# EAGLE board SMPS_Schematic (EAGLE 7.2.0)
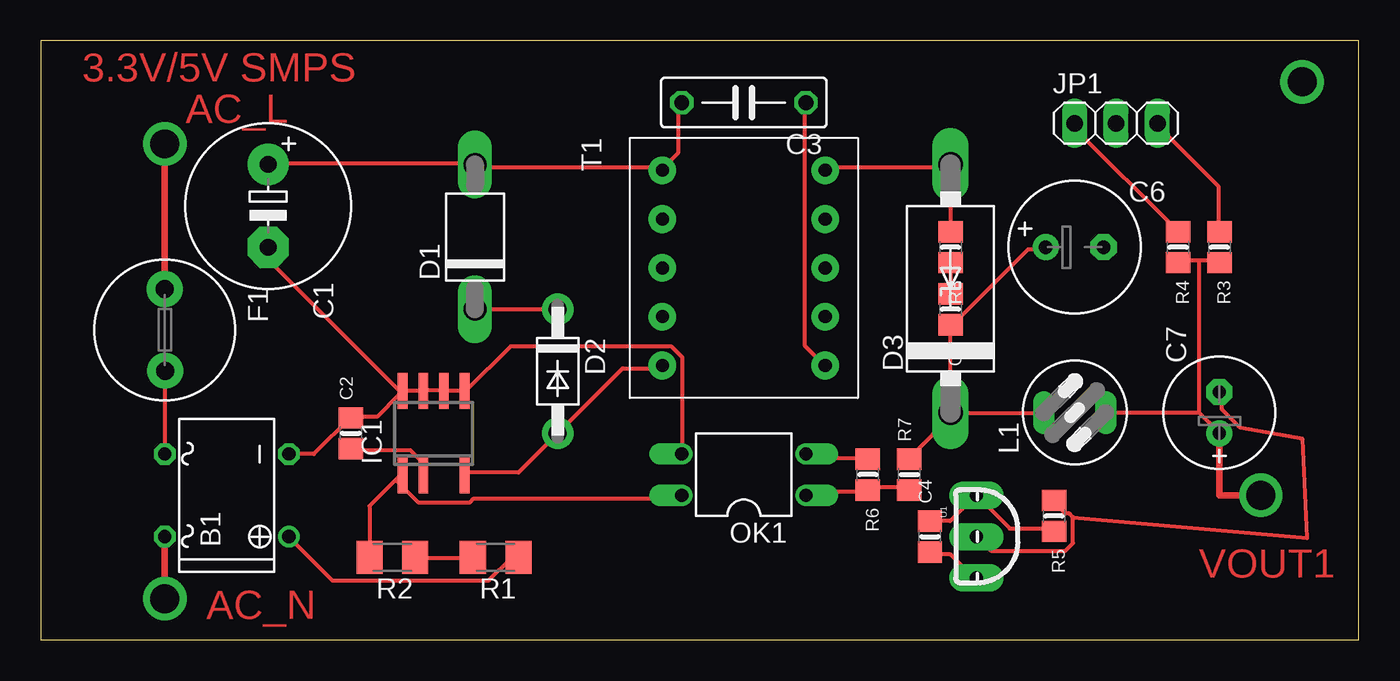
[diagram p0: board, top side]
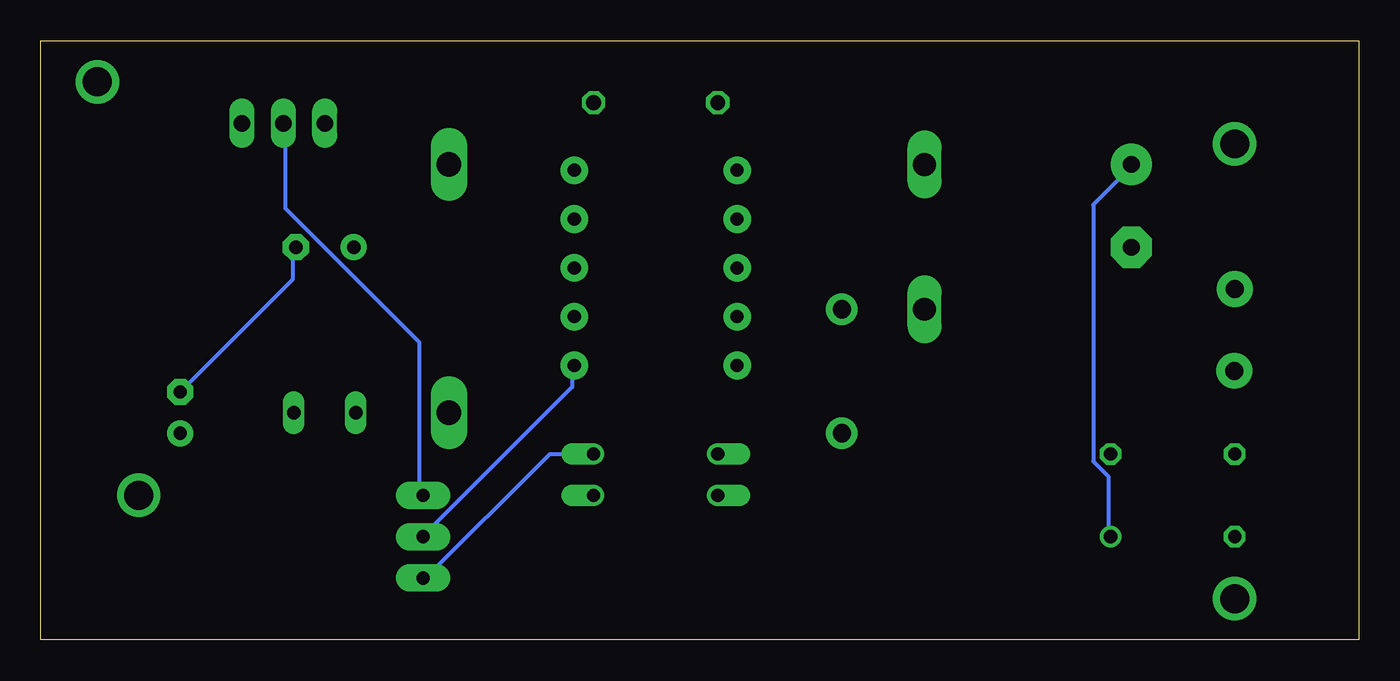
[diagram p1: board, bottom side, seen from below]

Size 80.95 x 36.82 mm. Coordinates in mm from the lower left corner, seen from the top.
Outline: 0,0 80.95,0 80.95,36.82 0,36.82 0,0
Copper layers (1*16): Top 0.035mm / dielectric 1.5mm / Bottom 0.035mm
Design rules "default *": minimum track width 10mil, minimum drill 24mil, track to track 8mil, track to pad 8mil, pad to pad 8mil, via to via 8mil, smd to smd 8mil, copper to edge 40mil, drill to drill 8mil, minimum pad ring 10mil, minimum via ring 8mil, stop-mask expansion 4mil, vias tented up to drill 2mil, thermal gap 10mil

## Footprints (pad centres in the part's own frame; a part is rotated, then mirrored left to right if it is on the bottom)
B-DIL = drill 0.813: + -2.54,-3.81 | drill 0.813 octagon: - 2.54,-3.81; AC1 2.54,3.81; AC2 -2.54,3.81
E5-10,5 = drill 1.016 pad 2.54: + -2.54,0 | drill 1.016 pad 2.54 octagon: - 2.54,0
0805-NO = smd 1.3 x 1.5: 1 -0.95,0; 2 0.95,0
C075-032X103 = drill 0.914 octagon: 1 -3.81,0; 2 3.81,0
E3,5-8 = drill 0.813 pad 1.6: + -1.778,0 | drill 0.813 pad 1.6 octagon: - 1.778,0
E2,5-7 = drill 0.813 pad 1.6: + -1.27,0 | drill 0.813 pad 1.6 octagon: - 1.27,0
CB417-15 = drill 1.397 long: A 2.54,0; C -6.35,0
DO41-10 = drill 1.118 pad 1.93: A 3.81,0; C -3.81,0
C4111-15 = drill 1.499 long: A 7.62,0; C -7.62,0
TR5 = drill 1.1 pad 2.2: P$1 -2.52,-0.01; P$2 2.51,0.02
SO8-C(D_PACKAGE) = smd 0.6 x 2.2: 1 -1.905,-2.6; 2 -0.635,-2.6; 4 1.905,-2.6; 5 1.905,2.6; 6 0.635,2.6; 7 -0.635,2.6; 8 -1.905,2.6
1X03 = drill 1.016 long: 1 -2.54,0; 2 0,0; 3 2.54,0
82114R = drill 0.813 long: 1 0,1.905; 2 0,-1.905
DIL04 = drill 0.813 offset: 1 -1.27,-3.81; 2 1.27,-3.81; 3 1.27,3.81; 4 -1.27,3.81
M1206 = smd 1.6 x 2: 1 -1.4,0; 2 1.4,0
EE16 = drill 0.8 pad 1.7: P$1 -6,-5; P$2 -3,-5; P$3 0,-5; P$4 3,-5; P$5 6,-5; P$6 6,5; P$7 3,5; P$8 0,5; P$9 -3,5; P$10 -6,5
TO-92 = drill 0.813 pad 1.676 long: 1 -2.54,0.318; 2 0,0.318; 3 2.54,0.318

## Placement (x,y rotation side)
B1  [B-DIL]  11.43,8.89 90 top
C1  10uF / 400V  [E5-10,5]  13.97,26.67 270 top
C2  10uF / 16V  [0805-NO]  19.05,12.7 90 top
C3  2.2nF / 250VAC  [C075-032X103]  43.18,33.02 180 top
C4  100nF  [0805-NO]  54.61,6.35 90 top
C5  470pF / 100V  [0805-NO]  55.88,20.32 270 top
C6  330uF / 16V  [E3,5-8]  63.5,24.13 0 top
C7  100uF / 16V  [E2,5-7]  72.39,13.97 90 top
D1  P6KE  [CB417-15]  26.67,26.67 90 top
D2  FR106  [DO41-10]  31.75,16.51 270 top
D3  SR360  [C4111-15]  55.88,21.59 90 top
F1  1A  [TR5]  7.62,19.05 270 top
IC1  TNY284DG  [SO8-C(D_PACKAGE)]  24.13,12.7 0 top
JP1  [1X03]  66.04,31.75 0 top
L1  82114R  [82114R]  63.5,13.97 90 top
OK1  PC817  [DIL04]  43.18,10.16 90 top
R1  2M  [M1206]  27.94,5.08 180 top
R2  2M  [M1206]  21.59,5.08 180 top
R3  23.7k  [0805-NO]  72.39,24.13 270 top
R4  23.7k  [0805-NO]  69.85,24.13 270 top
R5  9.09k  [0805-NO]  62.23,7.62 270 top
R6  1k  [0805-NO]  50.8,10.16 270 top
R7  133R  [0805-NO]  53.34,10.16 90 top
R8  22R  [0805-NO]  55.88,24.13 270 top
T1  TRANSFORMER_EE16  [EE16]  43.18,22.86 270 top
U1  TL431  [TO-92]  57.15,6.35 270 top

## Library data of the parts
B1 = rectifier
C1 C3 C6 C7 R1 R2 = resistor
C2 C4 C5 R3-R8 = microbuilder
D1-D3 U1 = NRG Lib
F1 = nrg_single
IC1 = power_integrations
JP1 = pinhead
L1 = inductors
OK1 = NRG Lib; MPN: PC817X4J000F; OC_FARNELL: 9707727; OC_NEWARK: 97K7059
T1 = nrg_iso_rhythm

## Nets
AN1: C5.2 C6.+ D3.C L1.1 R7.2
BP/M: C2.1 IC1.2
CAT1: C4.1 OK1.2 R6.1 U1.3
DRAIN: D2.A IC1.4 T1.P$5
EN/UV1: IC1.1 OK1.4 R2.2
GND: C7.+ L1.2 R3.2 R4.2
GND1: C3.1 C6.- C7.- R5.1 T1.P$6 U1.2
HV+: B1.+ C1.+ C3.2 D1.A R1.1 T1.P$1
L: F1.P$1
N: B1.AC2
N$1: JP1.1 R4.1
N$2: JP1.3 R3.1
N$5: OK1.1 R6.2 R7.1
N$6: D1.C D2.C
N$7: C5.1 R8.2
N$9: R1.2 R2.1
N$13: C4.2 JP1.2 R5.2 U1.1
N$50: B1.AC1 F1.P$2
SEC1: D3.A R8.1 T1.P$10
SOURCE: B1.- C1.- C2.2 IC1.5 IC1.6 IC1.7 IC1.8 OK1.3

## Tracks (layer width: path | path; a pad name or v marks a point on that pad's centre or on a via)
AC_L  (via drill 1.78)
  Top 0.406: 7.62,21.59 v7.62,30.48
AN1
  Top 0.254: 56.08,13.95 53.34,11.2 R7.2 | 56.08,13.95 61.57,13.95 L1.1 | 56.08,13.95 D3.C 55.85,14.17 55.85,19.2 C5.2 56.08,19.43 60.66,24 61.57,24 C6.+
BP/M
  Top 0.254: C2.1 19.05,11.66 22.71,11.66 23.39,10.97 23.39,10.29 IC1.2
CAT1
  Top 0.254: R6.1 50.6,11.2 47.4,11.2 47.17,11.43 OK1.2 | C4.1 54.71,5.26 55.85,5.26 57.45,3.66 U1.3
  Bottom 0.254: OK1.2 49.68,11.43 57.45,3.66 U1.3
DRAIN
  Top 0.254: IC1.4 26.14,10.29 29.34,10.29 D2.A 35.74,16.69 38.02,16.69 T1.P$5
EN/UV1
  Top 0.254: 21.79,9.83 22.02,10.06 IC1.1 | 21.79,9.83 20.19,8.23 20.19,5.26 R2.2 | 21.79,9.83 23.17,8.46 26.37,8.46 26.59,8.69 39.17,8.69 OK1.4
GND  (via drill 1.78)
  Top 0.254: 71.17,23.32 72.31,23.32 R3.2 | 71.17,23.32 70.03,23.32 R4.2 | 71.17,13.95 71.17,23.32 | 71.17,13.95 72.31,12.8 C7.+ | 71.17,13.95 65.46,13.95 L1.2
  Top 0.406: C7.+ 72.39,8.89 v74.93,8.89
  other vias: 77.47,34.29
GND1
  Top 0.254: 63.4,7.54 63.17,7.77 62.94,7.77 62.25,8.46 R5.1 | 63.4,7.54 63.4,5.94 62.94,5.49 58.37,5.49 57.68,6.17 U1.2 | C3.1 46.94,32.92 46.94,18.06 48.08,16.92 T1.P$6 | 63.4,7.54 77.77,6.27 77.5,12.34 73.69,13.03 72.54,14.17 72.54,15.09 C7.-
  Bottom 0.254: C7.- 65.46,22.17 65.46,24 C6.- | U1.2 57.45,6.4 48.31,15.55 48.31,16.69 T1.P$6
HV+
  Top 0.254: R1.1 29.34,5.03 28.88,5.03 27.51,3.66 17.91,3.66 15.39,6.17 B1.+ | C3.2 39.17,32.92 39.17,29.95 38.25,29.03 T1.P$1 38.02,29.03 26.82,29.03 D1.A 26.59,29.26 14.02,29.26 C1.+
  Bottom 0.254: B1.+ 15.39,6.4 15.39,10.06 16.31,10.97 16.31,26.75 14.02,29.03 C1.+
N  (via drill 1.78)
  Top 0.406: B1.AC2 v7.62,2.54
N$1
  Top 0.254: R4.1 69.8,25.15 63.4,31.55 JP1.1
N$2
  Top 0.254: R3.1 72.31,25.15 72.31,27.89 68.66,31.55 JP1.3
N$5
  Top 0.254: R7.1 53.34,9.37 50.82,9.37 R6.2 50.6,9.14 47.4,9.14 47.17,8.91 OK1.1
N$6
  Top 0.254: D2.C 31.62,20.34 26.82,20.34 D1.C
N$7
  Top 0.254: C5.1 55.85,21.49 55.85,23.09 R8.2
N$9
  Top 0.254: R2.1 23.17,5.03 26.37,5.03 R1.2
N$13
  Top 0.254: C4.2 54.71,7.31 55.85,7.31 57.45,8.91 U1.1 57.68,8.69 59.51,6.86 62.03,6.86 R5.2
  Bottom 0.254: JP1.2 65.91,31.55 65.91,26.52 57.68,18.29 57.68,8.91 U1.1
N$50
  Top 0.254: B1.AC1 7.62,16.46 F1.P$2
SEC1
  Top 0.254: 55.85,29.03 55.85,25.15 R8.1 | 55.85,29.03 48.31,29.03 T1.P$10 | 55.85,29.03 D3.A
SOURCE
  Top 0.254: 24.77,15.32 23.62,15.32 IC1.7 23.39,15.32 22.25,15.32 IC1.8 | 24.77,15.32 25.91,15.32 IC1.5 26.14,15.32 28.88,18.06 38.71,18.06 39.39,17.37 39.39,11.43 OK1.3 | 24.77,15.32 IC1.6 | 19.05,13.72 20.65,13.72 22.02,15.09 IC1.8 | B1.- 16.76,11.43 19.05,13.72 | 19.05,13.72 C2.2 | C1.- 14.02,24 14.02,23.32 22.02,15.32 IC1.8

## Text on the board
Top: 3.3V/5V SMPS | AC_L | VOUT1 | AC_N